# EAGLE board FunControler (EAGLE 6.4)
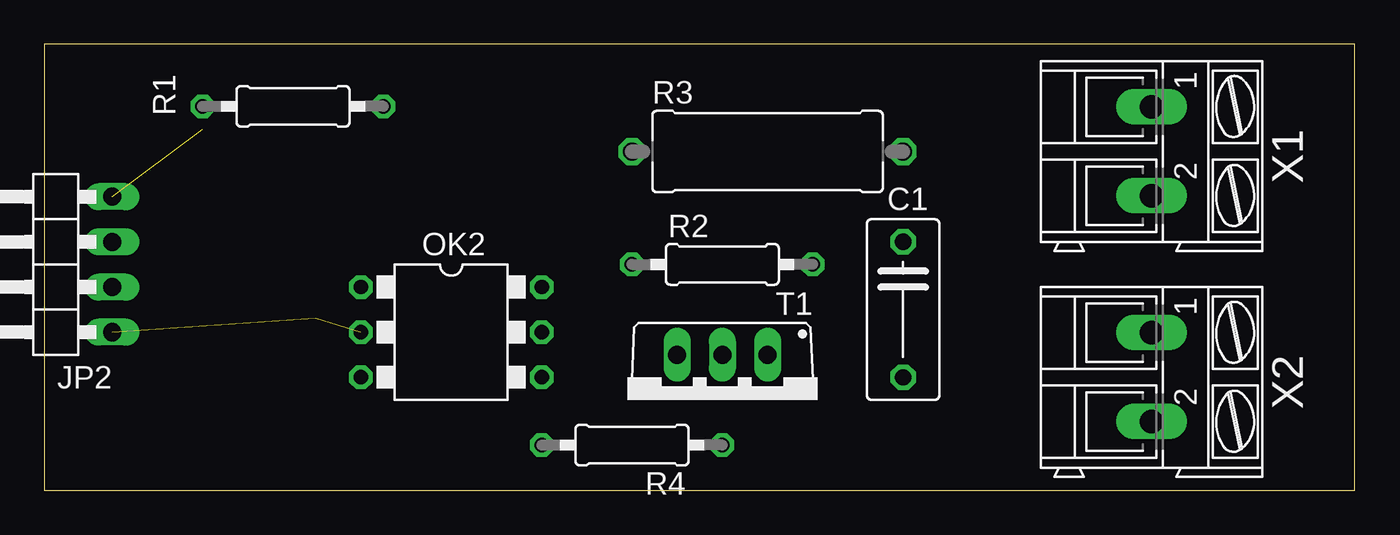
[diagram p0: board, top side]
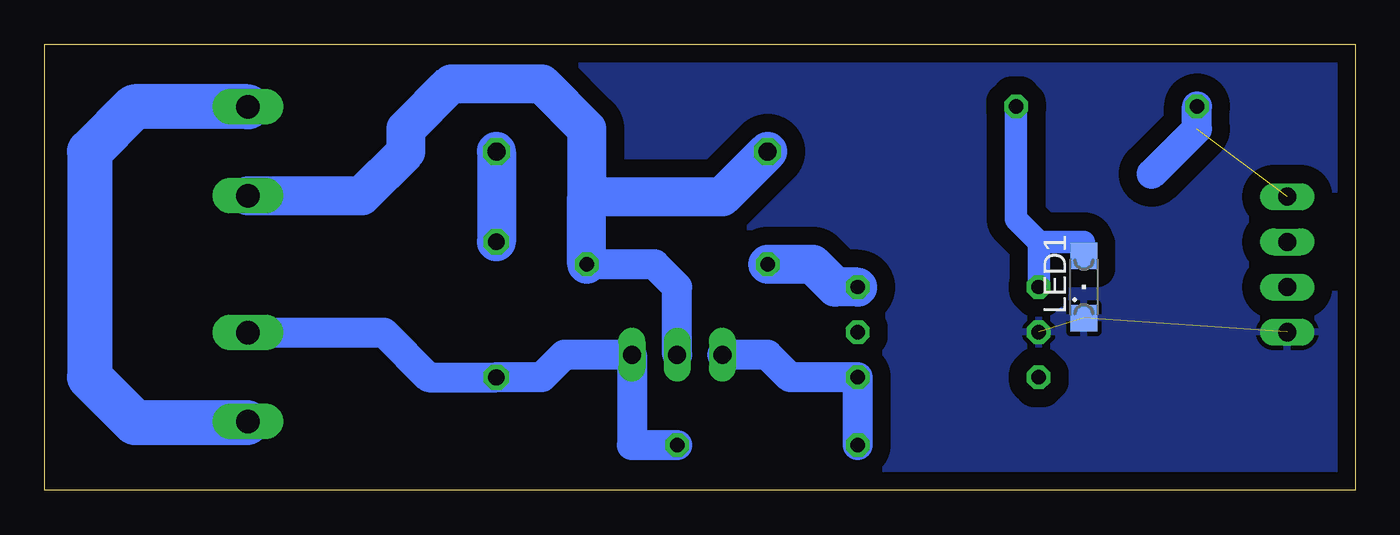
[diagram p1: board, bottom side, seen from below]

Size 73.64 x 25.07 mm. Coordinates in mm from the lower left corner, seen from the top.
Outline: 0,0 73.64,0 73.64,25.07 0,25.07 0,0
Copper layers (1*16): Top 0.035mm / dielectric 1.5mm / Bottom 0.035mm
Design rules "default": minimum track width 10mil, minimum drill 24mil, track to track 8mil, track to pad 8mil, pad to pad 8mil, via to via 8mil, smd to smd 8mil, copper to edge 40mil, drill to drill 8mil, minimum pad ring 10mil, minimum via ring 8mil, stop-mask expansion 4mil, vias tented up to drill 0mil, thermal gap 10mil

## Footprints (pad centres in the part's own frame; a part is rotated, then mirrored left to right if it is on the bottom)
C075-042X103 = drill 0.914 octagon: 1 -3.81,0; 2 3.81,0
1X04/90 = drill 1.016 long: 1 -3.81,-3.81; 2 -1.27,-3.81; 3 1.27,-3.81; 4 3.81,-3.81
SML1206 = smd 1.5 x 1.5: A 1.75,0; C -1.75,0
DIL06B = drill 0.813 octagon: 1 -2.54,-5.08; 2 0,-5.08; 3 2.54,-5.08; 4 2.54,5.08; 5 0,5.08; 6 -2.54,5.08
0207/10 = drill 0.813 octagon: 1 -5.08,0; 2 5.08,0
P0613/15 = drill 1.016 octagon: 1 -7.62,0; 2 7.62,0
TO220BV = drill 1.016 long: G 2.54,-2.54; T1 -2.54,-2.54; T2 0,-2.54
AK300/2 = drill 1.321 long: 1 -2.515,0; 2 2.489,0

## Placement (x,y rotation side)
C1  100nF (630V)  [C075-042X103]  48.26,10.16 270 top
DRILEGEND  [DRILEGEND]  92.96,53.59 0 top  (outside the outline)
JP2  Connector  [1X04/90]  0,12.7 90 top
LED1  [SML1206]  15.24,11.43 90 bottom
OK2  MOC3041T  [DIL06B]  22.86,8.89 270 top
R1  1K  [0207/10]  13.97,21.59 0 top
R2  360  [0207/10]  38.1,12.7 0 top
R3  100 (1/2W)  [P0613/15]  40.64,19.05 0 top
R4  330  [0207/10]  33.02,2.54 180 top
T1  BT138-V  [TO220BV]  38.1,5.08 180 top
U$1  [A5L-LOC]  -60.96,-69.85 0 top  (outside the outline)
X1  FunOut  [AK300/2]  62.23,19.05 270 top
X2  AC IN  [AK300/2]  62.23,6.35 270 top

## Library data of the parts
C1 R1-R4 = rcl
DRILEGEND = drilegend
JP2 = pinhead
LED1 = led
OK2 = optocoupler; OC_FARNELL: unknown; OC_NEWARK: unknown
T1 = triac
U$1 = frames
X1 X2 = con-ptr500; OC_FARNELL: unknown; OC_NEWARK: unknown

## Nets
GND: JP2.1 LED1.C OK2.2
N$1: JP2.4 R1.1
N$4: X1.1 X2.2
N$5: LED1.A OK2.1 R1.2
N$6: C1.2 R4.1 T1.T1 X2.1
N$7: OK2.4 R4.2 T1.G
N$8: OK2.6 R2.1
N$9: R2.2 R3.1 T1.T2 X1.2
N$10: C1.1 R3.2

## Tracks (layer width: path | path; a pad name or v marks a point on that pad's centre or on a via)
GND  (2 unrouted)
  pour Bottom (isolate 1.016): -1.27,26.67 74.93,26.67 74.93,-3.81 -1.27,-3.81
N$1  (1 unrouted)
  Bottom 1.676: 11.43,17.78 8.89,20.32 R1.1
N$4
  Bottom 1.676: 62.28,3.81 X2.2
  Bottom 2.54: X1.1 68.61,21.57 71.12,19.05 71.12,6.35 68.58,3.81 62.28,3.81
N$5
  Bottom 1.27: R1.2 19.05,15.24 17.78,13.97 | 17.78,13.97 OK2.1 | LED1.A 15.24,13.97 17.78,13.97
N$6
  Bottom 1.676: X2.1 54.59,8.87 52.07,6.35 C1.2 45.72,6.35 44.45,7.62 T1.T1 40.64,2.54 R4.1
N$7
  Bottom 1.676: T1.G 33.02,7.62 31.75,6.35 OK2.4 R4.2
N$8
  Bottom 2.184: OK2.6 29.21,11.43 30.48,12.7 R2.1
N$9
  Bottom 1.676: T1.T2 38.1,11.43 39.37,12.7 R2.2
  Bottom 2.184: R2.2 43.18,16.51 | 43.18,16.51 35.56,16.51 R3.1 | X1.2 55.83,16.56 53.34,19.05 53.34,20.32 50.8,22.86 45.72,22.86 43.18,20.32 43.18,16.51
N$10
  Bottom 2.184: R3.2 C1.1

## Text on the board
Document: PCB
centerDrill: Modyfikacja testera | VFS169 | Tomasz Pasierbski